# EAGLE board fanout (EAGLE 7.4.0)
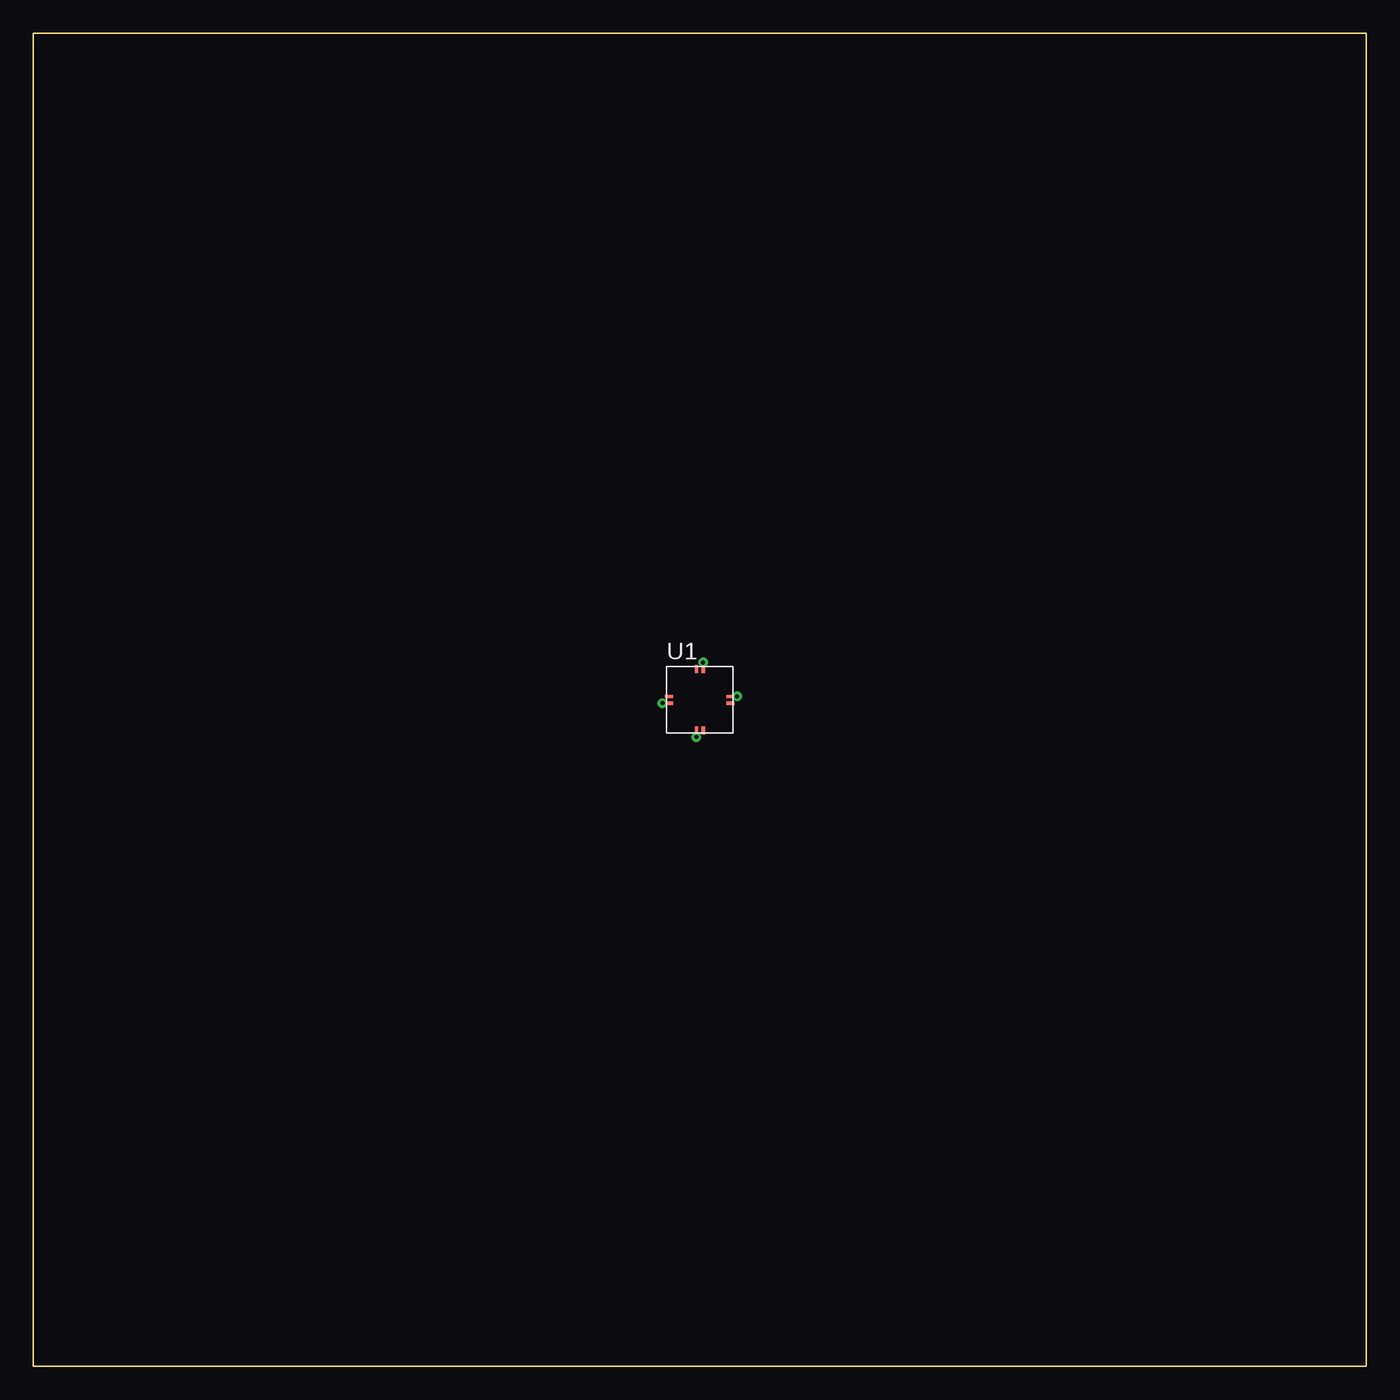
[diagram p0: board, top side]

Size 100 x 100 mm. Coordinates in mm from the lower left corner, seen from the top.
Outline: 0,0 100,0 100,100 0,100 0,0
Copper layers used: Top

## Footprints (pad centres in the part's own frame; a part is rotated, then mirrored left to right if it is on the bottom)
QFN8 = smd 0.6 x 0.25: 1 -2.3,-0.25; 2 -2.3,0.25; 5 2.3,0.25; 6 2.3,-0.25 | smd 0.25 x 0.6: 3 -0.25,-2.3; 4 0.25,-2.3; 7 0.25,2.3; 8 -0.25,2.3

## Placement (x,y rotation side)
U1  [QFN8]  50,50 0 top

## Library data of the parts
U1 = synth

## Nets
N$1: U1.1
N$3: U1.3
N$5: U1.5
N$7: U1.7

## Tracks (layer width: path | path; a pad name or v marks a point on that pad's centre or on a via)
N$1  (via drill 0.3 pad 0.6)
  Top 0.2: U1.1 v47.2,49.75
N$3  (via drill 0.3 pad 0.6)
  Top 0.2: U1.3 v49.75,47.2
N$5  (via drill 0.3 pad 0.6)
  Top 0.2: U1.5 v52.8,50.25
N$7  (via drill 0.3 pad 0.6)
  Top 0.2: U1.7 v50.25,52.8